# Altium PCB PCB_Biosensor_pcb_2_2025-12-19.pcbdoc
Units mm, origin at the board's own origin, x right, y up, seen from the top; angles counter-clockwise.
Board outline 137.65 x 100.65 mm, 2 copper layers (Top Layer, Bottom Layer); 4 components, 38 nets, 48 pads, 0 vias.
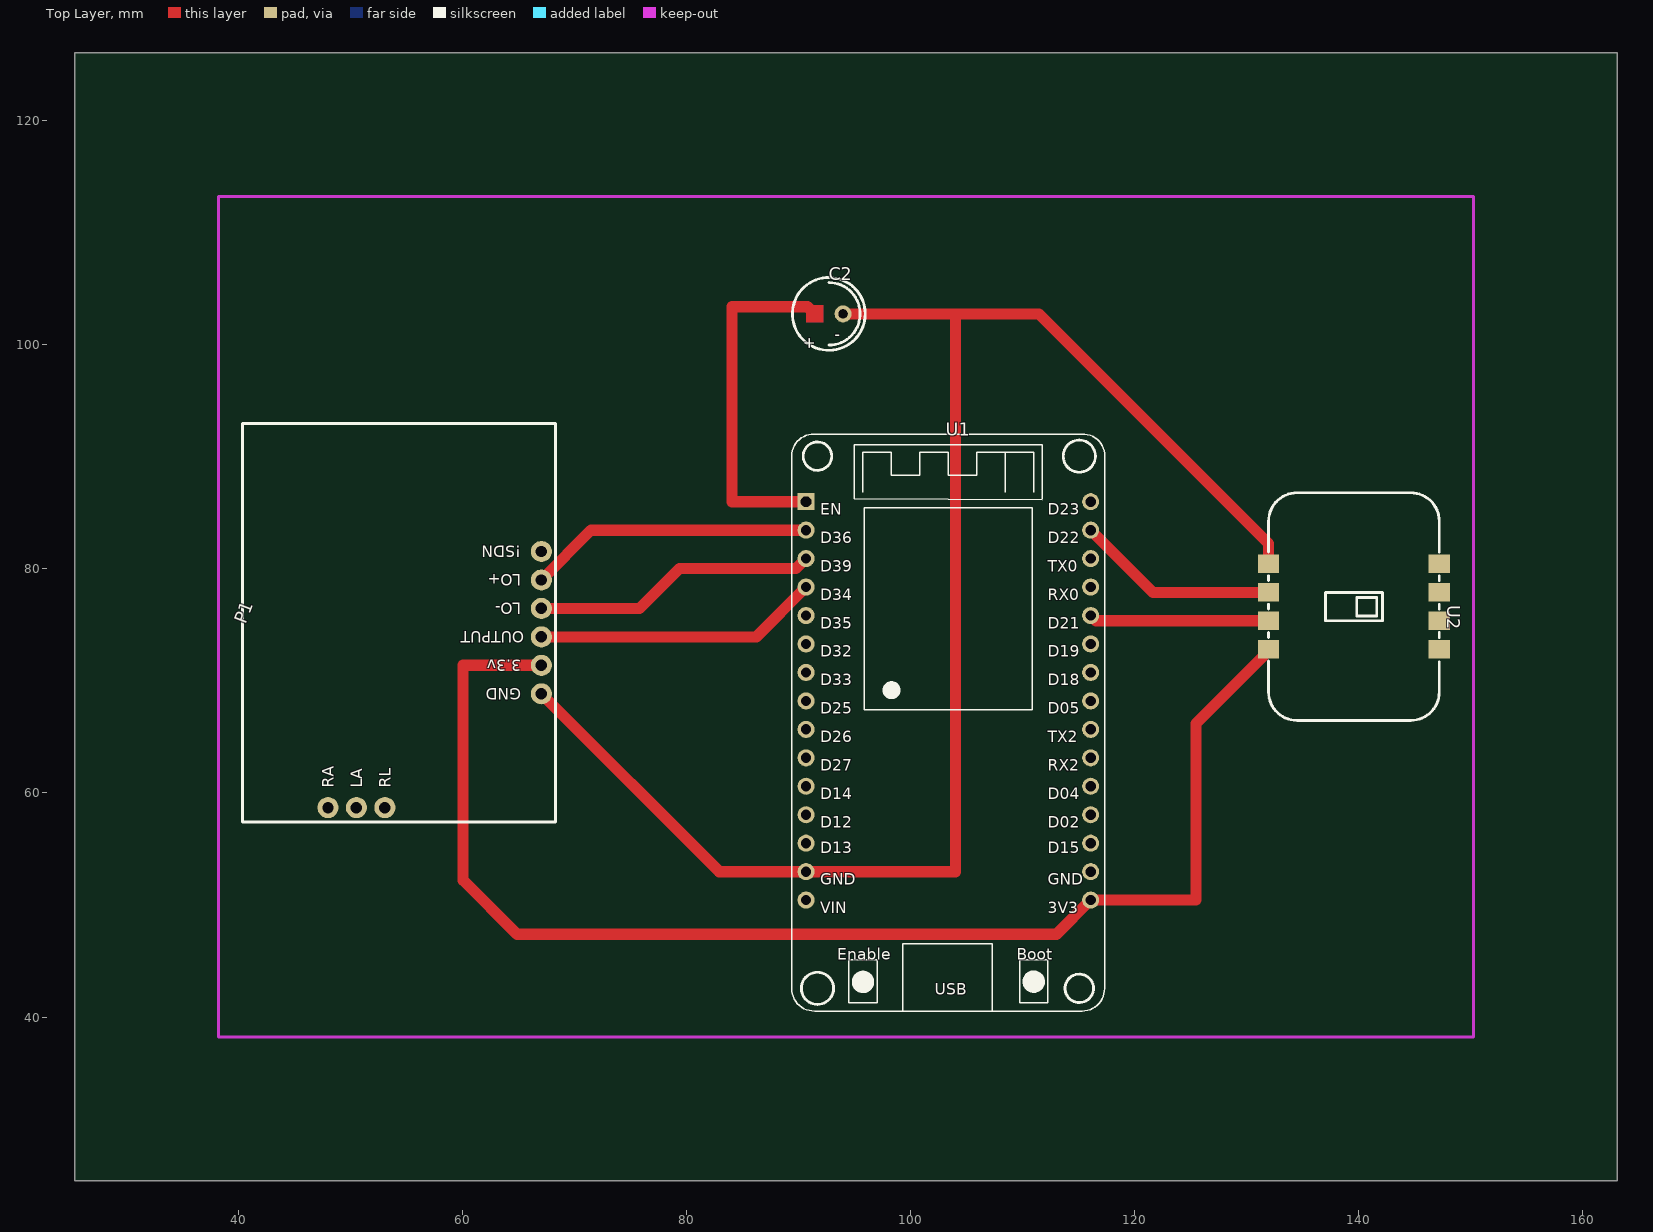
[diagram p0: Top Layer view]
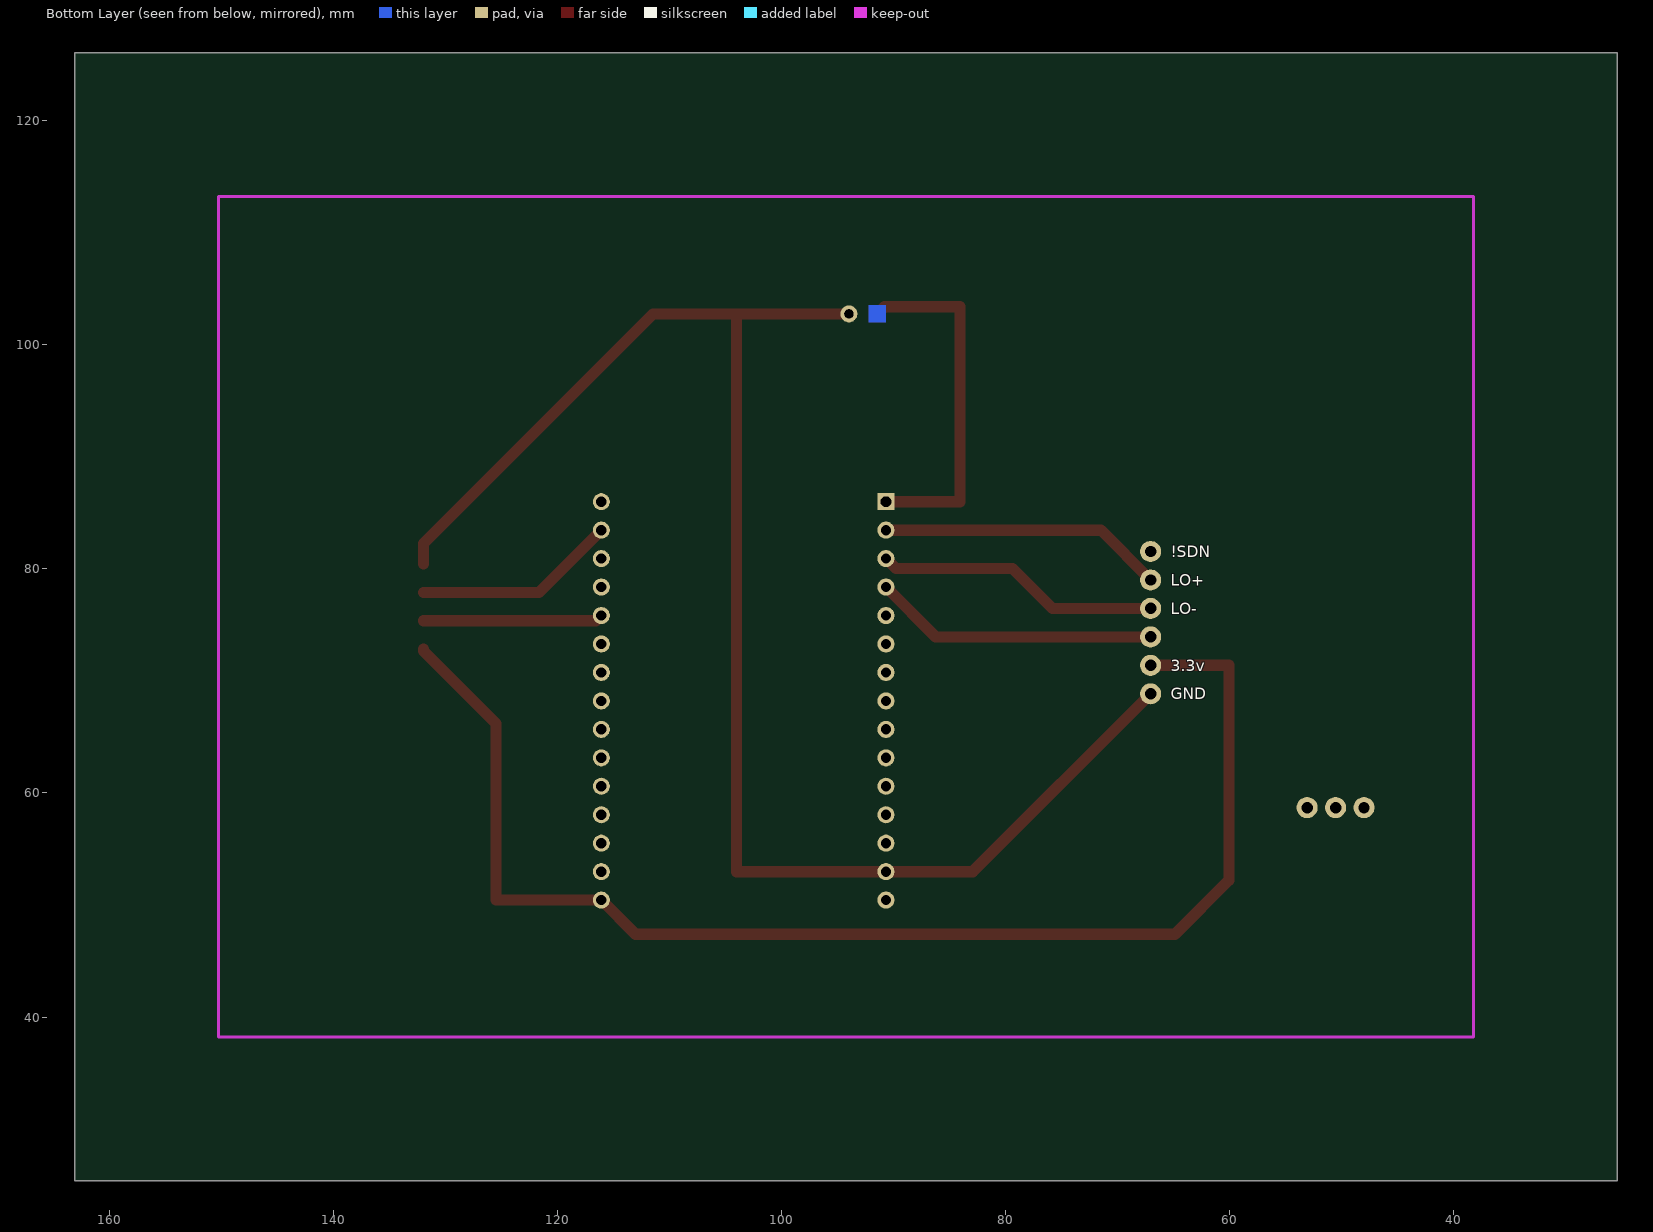
[diagram p1: Bottom Layer view, seen from below]

## Layer stack, top to bottom
Top Layer: signal copper (thickness not stored)
Dielectric: dielectric 0.32, FR-4, Dk 4.8
Bottom Layer: signal copper (thickness not stored)

## Board outline
163.054,25.4 25.4,25.4 25.4,126.054 163.054,126.054

## Components (designator, comment, footprint, x,y, rotation, side; value= is the part's Value field where it differs from the comment)
C2 "10uF" "100UF CAPACITOR, 2.54MM PIN CAPACITOR" 92.695,102.757 r0 top
P1 "AD8232" AD8232 57.516,70.118 r90 top
U1 "ESP32 DEVKIT V1 DOIT" DOIT-ESP32-DEVKIT-V1 90.663,85.993 r0 top
U2 "MAX30102_M" MAX30102_RE 139.304,76.595 r270 top

## Footprints (in the part's own frame and the unit in brackets; to place one, negate y for a bottom-side part, rotate by r counter-clockwise, add the part's x,y. Pads: shape width x height; smd on the part's side, far side on the other; paste and mask are expansions set on the pad)
"100UF CAPACITOR, 2.54MM PIN CAPACITOR" [mm]
  round 1.52 hole 0.8 slot 0.805 at 0 deg paste+0 mask+0.051: 2(1.27,0)
  Top Layer region: -2.03,0.76 -0.51,0.76 -0.51,0.76 -0.51,-0.76 -0.51,-0.76 -2.03,-0.76 -2.03,-0.76
  Bottom Layer region: -2.03,0.76 -0.51,0.76 -0.51,0.76 -0.51,-0.76 -0.51,-0.76 -2.03,-0.76 -2.03,-0.76
  Multi-Layer region: -2.03,0.76 -0.51,0.76 -0.51,0.76 -0.51,-0.76 -0.51,-0.76 -2.03,-0.76 -2.03,-0.76
  silkscreen extent -3.25,-3.25 3.25,3.25
AD8232 [mil]
  round 74 hole 40 paste+0 mask+2: 1(-450,175) 2(-450,275) 3(-450,375) 4(-50,-375) 5(50,-375) 6(150,-375) 7(250,-375) 8(350,-375) 9(450,-375)
  silkscreen extent -500,-425 900,675
DOIT-ESP32-DEVKIT-V1 [mil]
  rect 60x60 hole 36 slot 37.8 at 0 deg paste+0 mask+4: 1(0,0.01)
  round 60 hole 36 paste+0 mask+4: 2(0,-99.99) 3(0,-199.99) 4(0,-299.99) 5(0,-399.99) 6(0,-499.99) 7(0,-599.99) 8(0,-699.99) 9(0,-799.99) 10(0,-899.99) 11(0,-999.99) 12(0,-1099.99) 13(0,-1199.99) 14(0,-1299.99) 15(0,-1399.99) 16(999.99,0.01) 17(999.99,-99.99) 18(999.99,-199.99) 19(999.99,-299.99) 20(999.99,-399.99) 21(999.99,-499.99) 22(999.99,-599.99) 23(999.99,-699.99) 24(999.99,-799.99) 25(999.99,-899.99) 26(999.99,-999.99) 27(999.99,-1099.99) 28(999.99,-1199.99) 29(999.99,-1299.99) 30(999.99,-1399.99)
  silkscreen extent -50,-1790 1050,238
MAX30102_RE [mil]
  rect 65x75 smd paste+0 mask+2: 1(-151.43,-289.94) 2(-51.43,-289.94) 3(48.57,-289.94) 4(148.57,-289.94) 5(148.57,310.06) 6(48.57,310.06) 7(-51.43,310.06) 8(-151.43,310.06)
  silkscreen extent -401,-290 399,310

## Nets (pads, with @x,y where several pads share a name; then routed paths per layer and width w, separated by ;. In a path a pad name is that pad's centre, name@x,y a point inside that pad or via, vN(x,y) a via of type N, cw(c..) or ccw(c..) an arc to the next point about the centre after c; other vN are vias at no path point)
P1_1: P1.1
P1_2: P1.2
P1_3: P1.3
P1_4: C2.2 P1.4 U1.14 U2.1 | length 141.6
  Top Layer w1: P1.4 82.916,52.973 90.663,52.973 103.998,52.973 103.998,102.757 ; C2.2 111.45,102.757 131.94,82.268 U2.1
P1_5: P1.5 U1.30 U2.4 | length 119.9
  Top Layer w1: P1.5 60.056,71.388 60.056,52.211 64.882,47.385 113.016,47.385 116.063,50.433 125.461,50.433 125.461,66.181 131.94,72.659 U2.4
P1_6: P1.6 U1.4 | length 25.5
  Top Layer w1: P1.6 86.218,73.928 U1.4@90.663,78.373
P1_7: P1.7 U1.3 | length 25.5
  Top Layer w1: P1.7 75.804,76.468 79.36,80.024 89.774,80.024 U1.3@90.663,80.913
P1_8: P1.8 U1.2 | length 25.5
  Top Layer w1: P1.8 71.486,83.453 U1.2@90.663,83.453
P1_9: P1.9
U1_1: U1.1 | length 31.6
  Top Layer w1: U1.1 84.059,85.993 84.059,103.392 90.79,103.392 91.425,102.757
U1_5: U1.5
U1_6: U1.6
U1_7: U1.7
U1_8: U1.8
U1_9: U1.9
U1_10: U1.10
U1_11: U1.11
U1_12: U1.12
U1_13: U1.13
U1_15: U1.15
U1_16: U1.16
U1_17: U1.17 U2.2 | length 18.2
  Top Layer w1: U1.17@116.063,83.453 121.615,77.901 U2.2
U1_18: U1.18
U1_19: U1.19
U1_20: U1.20 U2.3 | length 16.1
  Top Layer w1: U1.20@116.063,75.833 116.535,75.361 U2.3
U1_21: U1.21
U1_22: U1.22
U1_23: U1.23
U1_24: U1.24
U1_25: U1.25
U1_26: U1.26
U1_27: U1.27
U1_28: U1.28
U1_29: U1.29
U2_5: U2.5
U2_6: U2.6
U2_7: U2.7
U2_8: U2.8

## Silkscreen, mask and mechanical layers (free items; w line width, h text height)
Document:
  lines w0.003: 94.227,75.727 94.227,75.727

## Text inside footprints (layer, text, board x,y; h text height)
C2: Top Overlay "-" at 93.711,101.225 h1 r180; Top Overlay "+" at 90.544,100.725 h1 r270
P1: Bottom Overlay "GND" at 65.263,68.34 h1.02; Bottom Overlay "3.3v" at 65.263,70.88 h1.02; Bottom Overlay "LO-" at 65.263,75.96 h1.02; Bottom Overlay "LO+" at 65.263,78.5 h1.02; Bottom Overlay "!SDN" at 65.263,81.04 h1.02; Top Overlay "GND" at 65.263,69.356 h1.02 r180; Top Overlay "3.3v" at 65.263,71.896 h1.02 r180; Top Overlay "!SDN" at 65.263,82.056 h1.02 r180; Top Overlay "LO-" at 65.263,76.976 h1.02 r180; Top Overlay "LO+" at 65.263,79.516 h1.02 r180; Top Overlay "LA" at 51.039,60.466 h1.02 r90; Top Overlay "RA" at 48.499,60.466 h1.02 r90; Top Overlay "RL" at 53.579,60.466 h1.02 r90; Top Overlay "OUTPUT" at 65.517,74.436 h1.02 r180
U1: Top Overlay "Enable" at 93.457,45.107 h1; Top Overlay "Boot" at 109.459,45.107 h1; Top Overlay "USB" at 102.163,42.003 h1; Top Overlay "EN" at 91.933,84.833 h1; Top Overlay "D36" at 91.933,82.293 h1; Top Overlay "D39" at 91.933,79.753 h1; Top Overlay "D34" at 91.933,77.213 h1; Top Overlay "D35" at 91.933,74.673 h1; Top Overlay "D32" at 91.933,72.133 h1; Top Overlay "D33" at 91.933,69.593 h1; Top Overlay "D13" at 91.933,54.607 h1; Top Overlay "D12" at 91.933,56.893 h1; Top Overlay "D14" at 91.933,59.433 h1; Top Overlay "D27" at 91.933,61.973 h1; Top Overlay "D26" at 91.933,64.513 h1; Top Overlay "D25" at 91.933,67.053 h1; Top Overlay "D05" at 112.253,67.053 h1; Top Overlay "TX2" at 112.253,64.513 h1; Top Overlay "RX2" at 112.253,61.973 h1; Top Overlay "D04" at 112.253,59.433 h1; Top Overlay "D02" at 112.253,56.893 h1; Top Overlay "D15" at 112.253,54.607 h1; Top Overlay "D18" at 112.253,69.593 h1; Top Overlay "D19" at 112.253,72.133 h1; Top Overlay "D21" at 112.253,74.673 h1; Top Overlay "RX0" at 112.253,77.213 h1; Top Overlay "TX0" at 112.253,79.753 h1; Top Overlay "D22" at 112.253,82.293 h1; Top Overlay "D23" at 112.253,84.833 h1; Top Overlay "GND" at 112.253,51.813 h1; Top Overlay "3V3" at 112.253,49.273 h1; Top Overlay "VIN" at 91.933,49.273 h1; Top Overlay "GND" at 91.933,51.813 h1